# Altium PCB HyperDrive.PcbDoc (part 1 of 2)
Units mm, origin at the board's own origin, x right, y up, seen from the top; angles counter-clockwise.
Board outline 100 x 100 mm, 8 copper layers (SU, GNDU, HSU, PWRU, PWRD, HSD, GNDD, SD), stack 0.757 mm thick; 201 components, 155 nets, 1129 pads, 0 vias.
Unrouted connection lines stored in the file: 714.
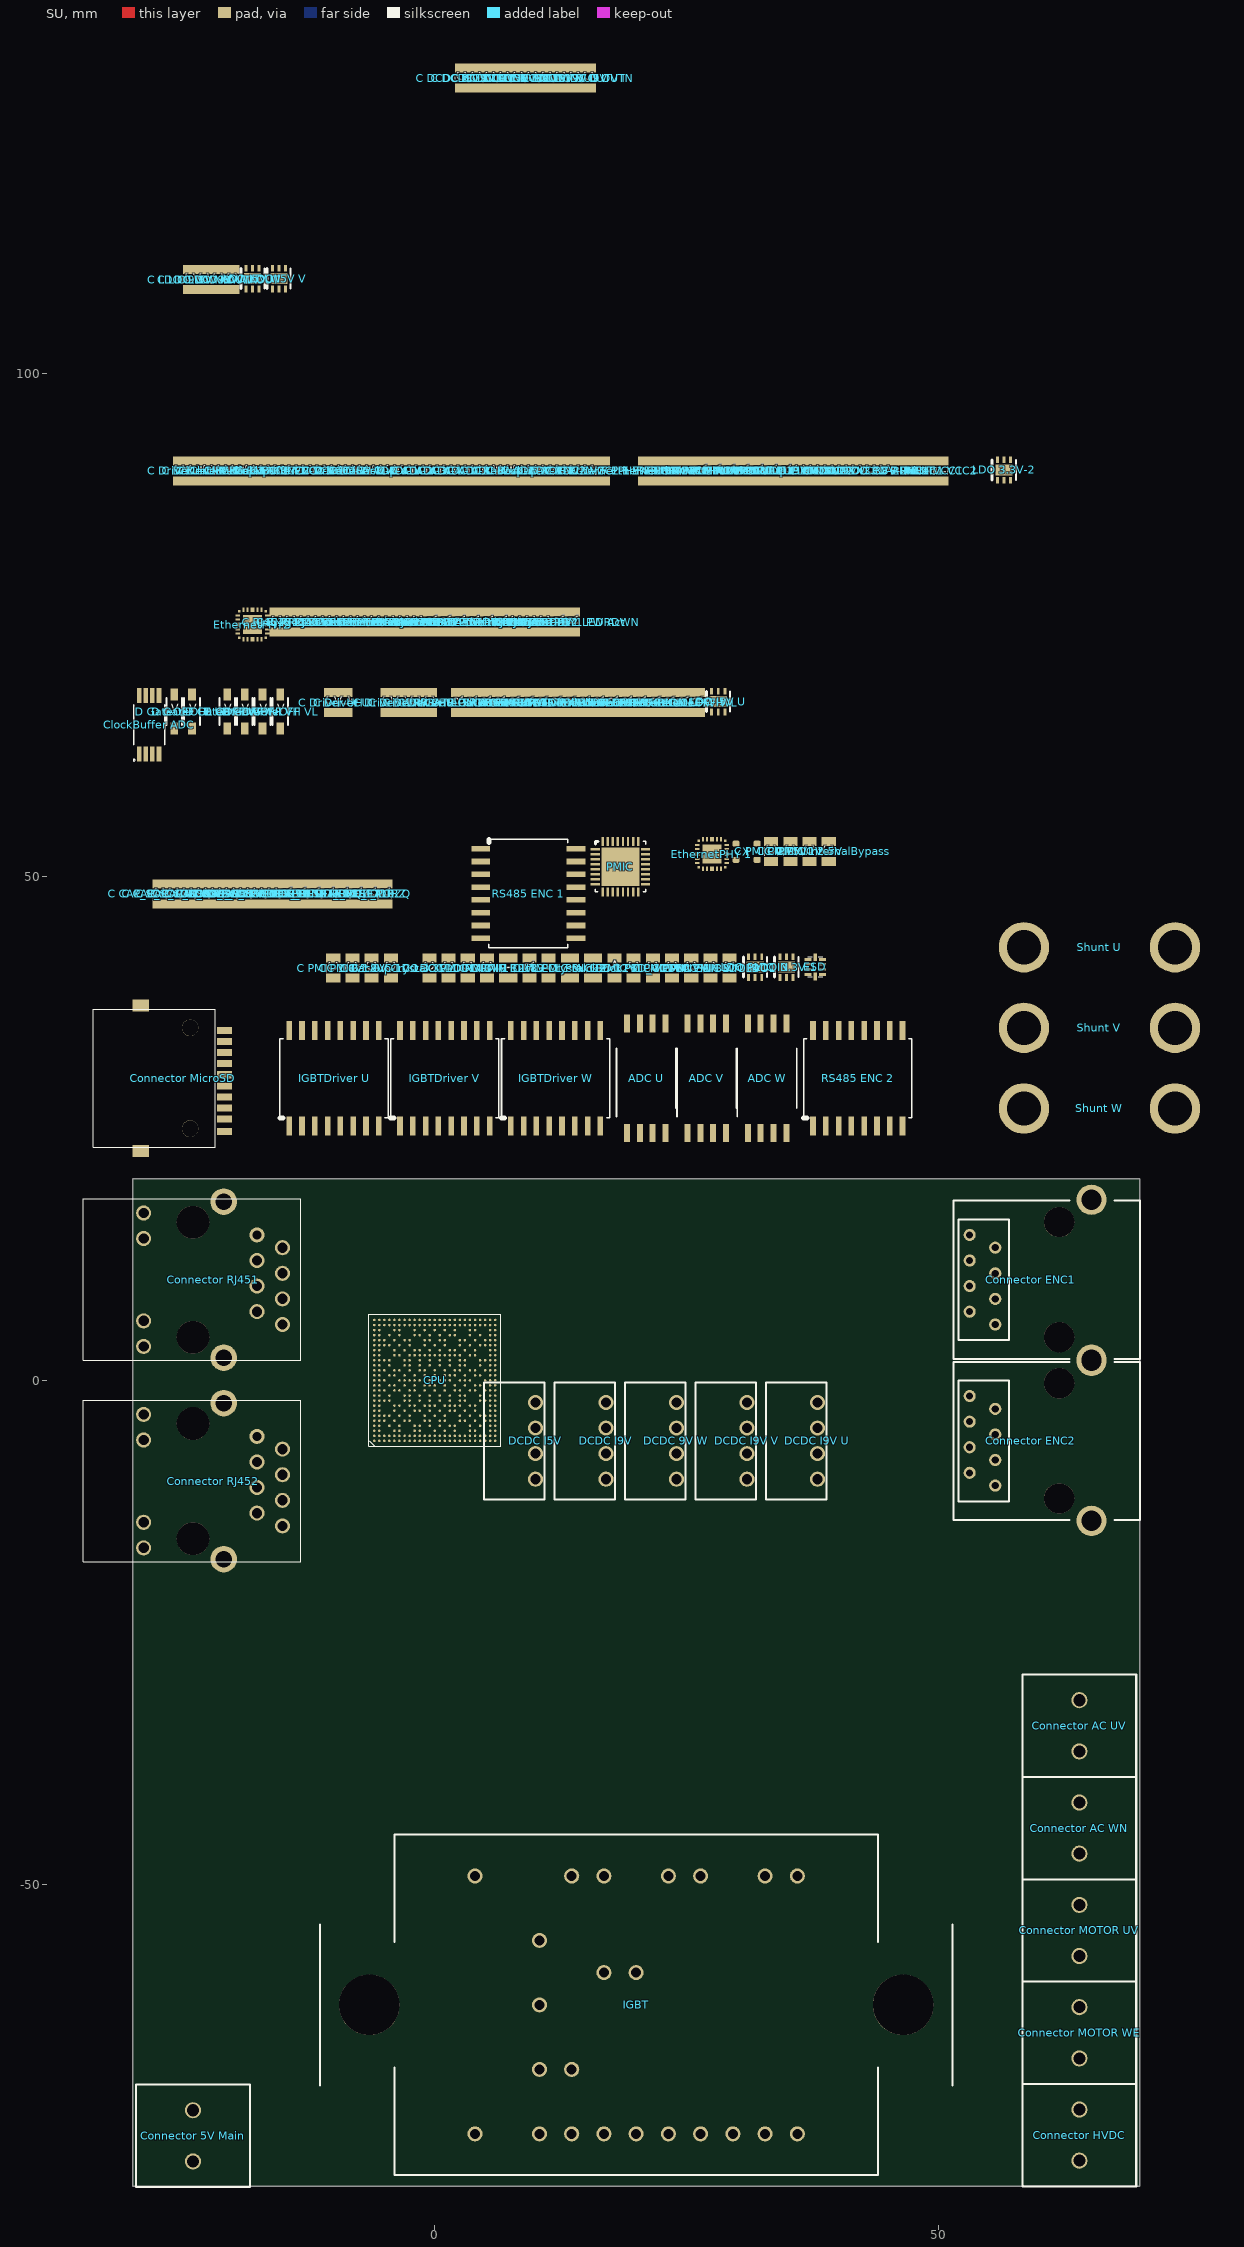
[diagram p0: SU view]
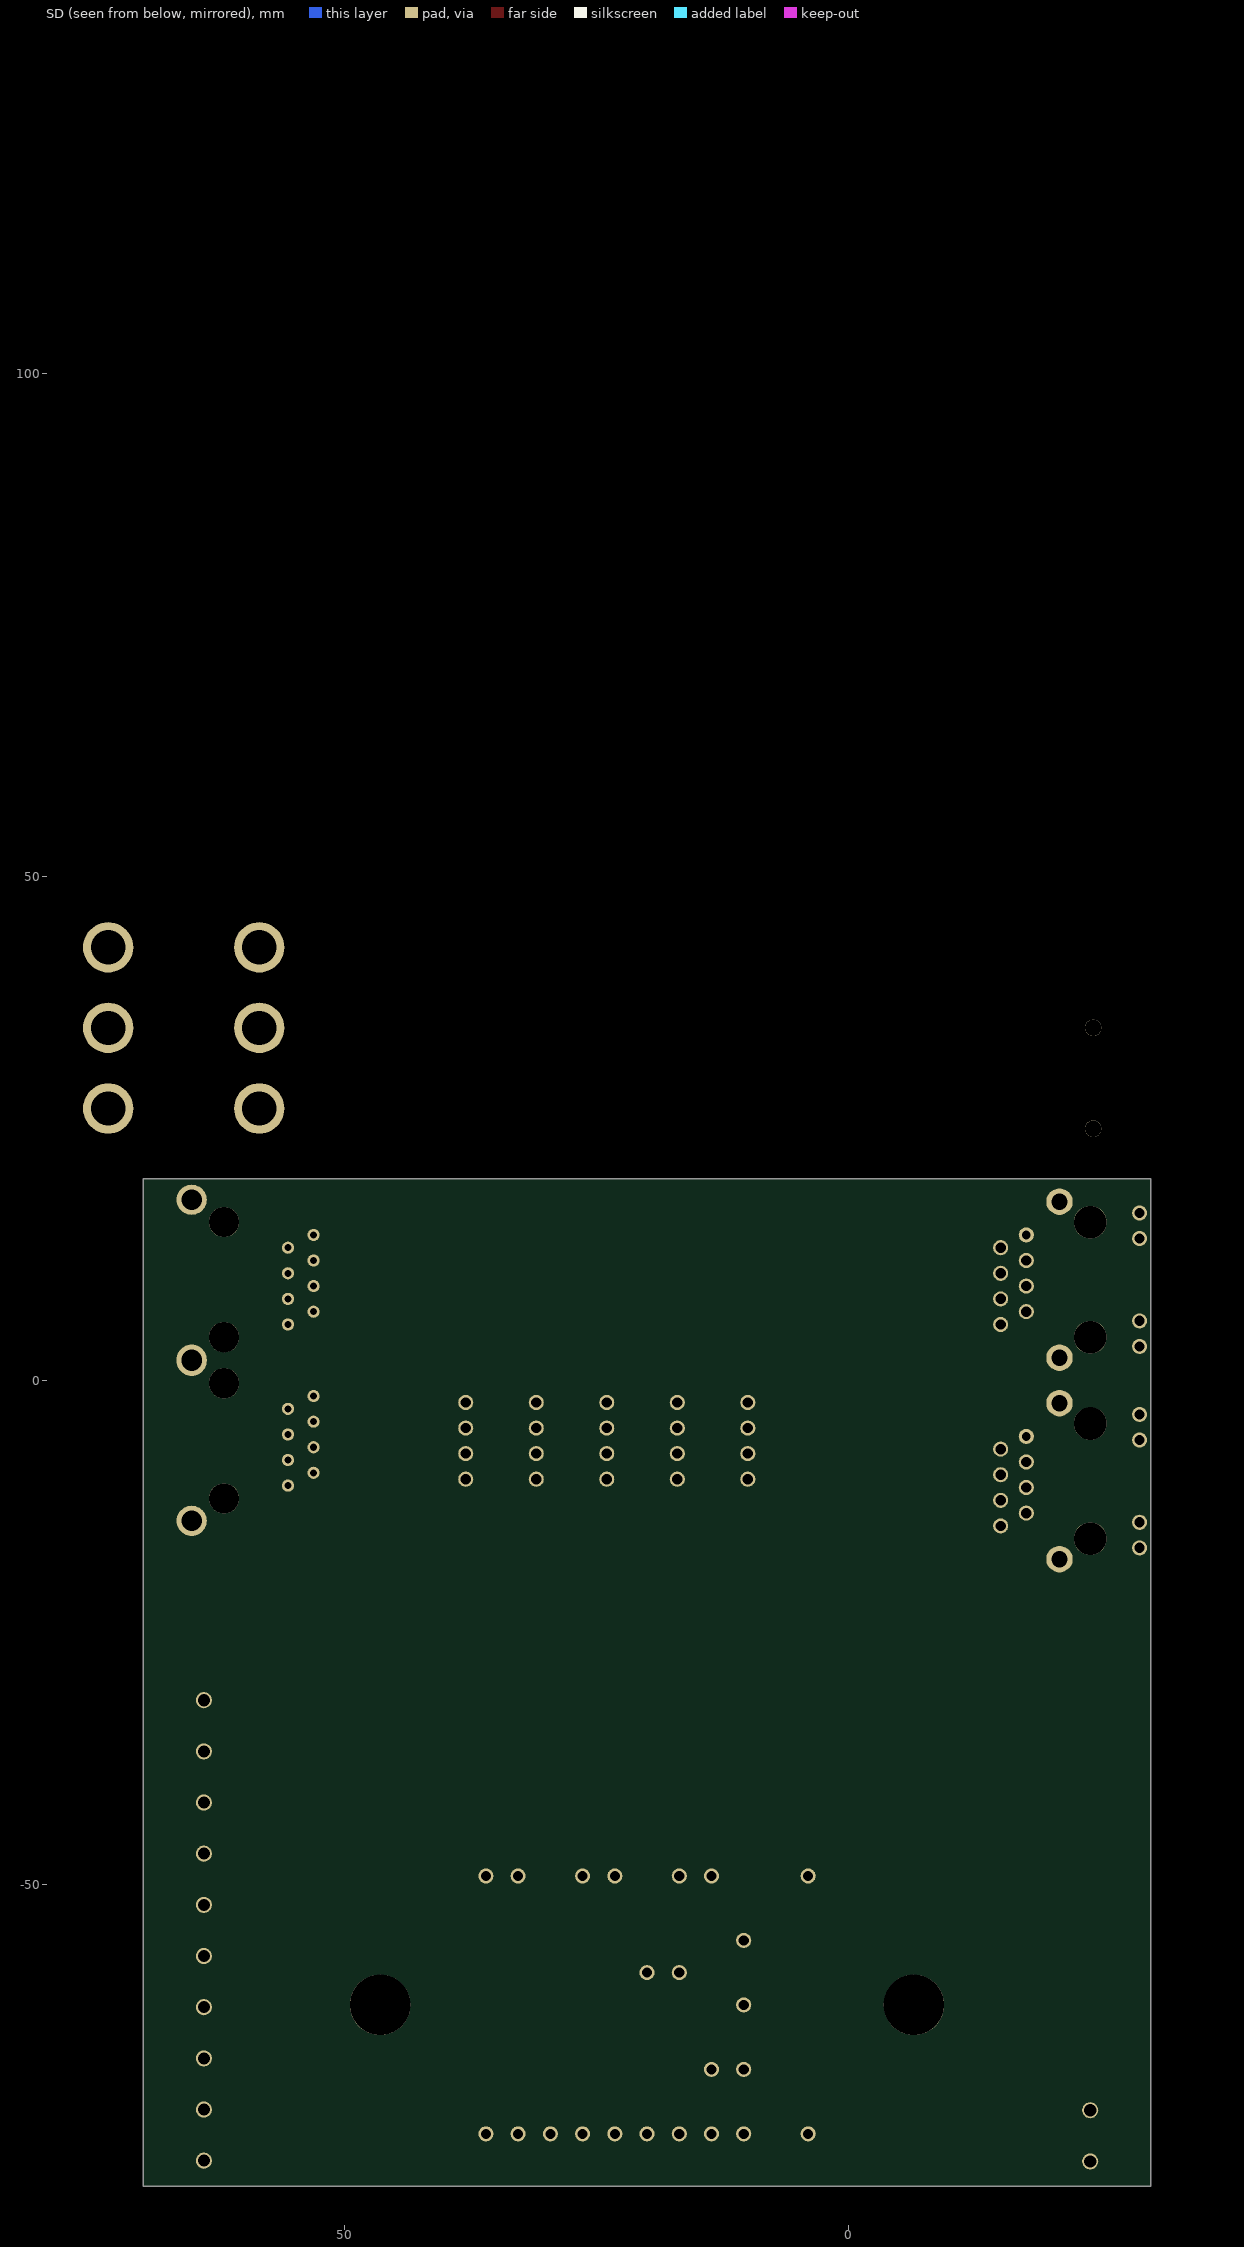
[diagram p1: SD view, seen from below]

## Layer stack, top to bottom
Top Solder: solder mask 0.03, Solder Resist, Dk 3.8
SU: signal copper 0.035
Prepreg 1/2: prepreg 0.0764, Prepreg, Dk 3.91
GNDU: signal copper 0.0152
Core 2/3: core 0.075, Core, Dk 3.99
HSU: signal copper 0.0152
Prepreg 3/4: prepreg 0.1088, Prepreg, Dk 4.16
PWRU: signal copper 0.0152
Core 4/5: core 0.075, Core, Dk 3.99
PWRD: signal copper 0.0152
Prepreg 5/6: prepreg 0.1088, Prepreg, Dk 4.16
HSD: signal copper 0.0152
Core 6/7: core 0.075, Core, Dk 3.99
GNDD: signal copper 0.0152
Prepreg 7/8: prepreg 0.0764, Prepreg, Dk 3.91
SD: signal copper 0.035
Bottom Solder: solder mask 0.03, Solder Resist, Dk 3.8

## Board outline
-30,-80 -30,20 70,20 70,-80

## Design rules (kind name [scope] priority, off if disabled: settings)
BoardOutlineClearance [All] p1 off: gap=0.2 ignorepadtopadclearanceinfootprint=FALSE
Clearance [All] p1: gap=0.099 ignorepadtopadclearanceinfootprint=TRUE except(0.079: Arc-Arc Arc-Track Arc-SMDPad Arc-THPad Arc-Via Arc-Fill Arc-Poly Arc-Region Arc-Text Track-Track Track-SMDPad Track-THPad Track-Via Track-Fill Track-Poly Track-Region Track-Text; 0.199: Arc-Hole Track-Hole SMDPad-Hole THPad-Hole Via-Hole Fill-Hole Poly-Hole Region-Hole Text-Hole)
ComponentClearance [All] p1: gap=0 collisioncheckmode=3 verticalgap=2540 showdistances=FALSE
DiffPairsRouting DiffPairsRouting_DDR_Address_Clock [InDifferentialPairClass('DDR_Address_Clock')] p1: maxlimit=0.5 minlimit=0.09 mostfreqgap=0.11 toplayer_mingap=0.1 toplayer_prefgap=0.1 toplayer_minwidth=0.16 toplayer_maxwidth=0.16 toplayer_prefwidth=0.16 midlayer1_minwidth=0.381 midlayer1_maxwidth=0.381 midlayer1_prefwidth=0.381 midlayer2_mingap=0.104 midlayer2_prefgap=0.104 midlayer2_minwidth=0.096 midlayer2_maxwidth=0.096 midlayer2_prefwidth=0.096 midlayer3_minwidth=0.381 midlayer3_maxwidth=0.381 midlayer3_prefwidth=0.381 midlayer4_minwidth=0.381 midlayer4_maxwidth=0.381 midlayer4_prefwidth=0.381 midlayer5_mingap=0.104 midlayer5_prefgap=0.104 midlayer5_minwidth=0.096 midlayer5_maxwidth=0.096 midlayer5_prefwidth=0.096 midlayer6_minwidth=0.381 midlayer6_maxwidth=0.381 midlayer6_prefwidth=0.381 bottomlayer_mingap=0.1 bottomlayer_prefgap=0.1 bottomlayer_minwidth=0.16 bottomlayer_maxwidth=0.16 bottomlayer_prefwidth=0.16 impedanceprofiledriven=TRUE maxuncoupledlength=10
DiffPairsRouting DiffPairsRouting_DDR_Byte0_Clock [InDifferentialPairClass('DDR_Byte0_Clock')] p2: maxlimit=0.5 minlimit=0.09 mostfreqgap=0.11 toplayer_mingap=0.1 toplayer_prefgap=0.1 toplayer_minwidth=0.16 toplayer_maxwidth=0.16 toplayer_prefwidth=0.16 midlayer1_minwidth=0.381 midlayer1_maxwidth=0.381 midlayer1_prefwidth=0.381 midlayer2_mingap=0.104 midlayer2_prefgap=0.104 midlayer2_minwidth=0.096 midlayer2_maxwidth=0.096 midlayer2_prefwidth=0.096 midlayer3_minwidth=0.381 midlayer3_maxwidth=0.381 midlayer3_prefwidth=0.381 midlayer4_minwidth=0.381 midlayer4_maxwidth=0.381 midlayer4_prefwidth=0.381 midlayer5_mingap=0.104 midlayer5_prefgap=0.104 midlayer5_minwidth=0.096 midlayer5_maxwidth=0.096 midlayer5_prefwidth=0.096 midlayer6_minwidth=0.381 midlayer6_maxwidth=0.381 midlayer6_prefwidth=0.381 bottomlayer_mingap=0.1 bottomlayer_prefgap=0.1 bottomlayer_minwidth=0.16 bottomlayer_maxwidth=0.16 bottomlayer_prefwidth=0.16 impedanceprofiledriven=TRUE maxuncoupledlength=10
DiffPairsRouting DiffPairsRouting_DDR_Byte1_Clock [InDifferentialPairClass('DDR_Byte1_Clock')] p3: maxlimit=0.5 minlimit=0.09 mostfreqgap=0.11 toplayer_mingap=0.1 toplayer_prefgap=0.1 toplayer_minwidth=0.16 toplayer_maxwidth=0.16 toplayer_prefwidth=0.16 midlayer1_minwidth=0.381 midlayer1_maxwidth=0.381 midlayer1_prefwidth=0.381 midlayer2_mingap=0.104 midlayer2_prefgap=0.104 midlayer2_minwidth=0.096 midlayer2_maxwidth=0.096 midlayer2_prefwidth=0.096 midlayer3_minwidth=0.381 midlayer3_maxwidth=0.381 midlayer3_prefwidth=0.381 midlayer4_minwidth=0.381 midlayer4_maxwidth=0.381 midlayer4_prefwidth=0.381 midlayer5_mingap=0.104 midlayer5_prefgap=0.104 midlayer5_minwidth=0.096 midlayer5_maxwidth=0.096 midlayer5_prefwidth=0.096 midlayer6_minwidth=0.381 midlayer6_maxwidth=0.381 midlayer6_prefwidth=0.381 bottomlayer_mingap=0.1 bottomlayer_prefgap=0.1 bottomlayer_minwidth=0.16 bottomlayer_maxwidth=0.16 bottomlayer_prefwidth=0.16 impedanceprofiledriven=TRUE maxuncoupledlength=10
HoleSize [All] p1: absolutevalues=TRUE maxlimit=1 minlimit=0.2 maxpercent=80.000 minpercent=20.000
HoleToHoleClearance [All] p1: gap=0.2 allowstackedmicrovias=TRUE
Length Length_DDR [InNetClass('DDR_HighSpeed')] p1: maxlimit=2540 minlimit=0 usedelayunits=TRUE mindelay=0.000000 maxdelay=500.000000
MatchedLengths MatchedLengths_DDR_Address [InNetClass('DDR_Address')] p1: tolerance=3 checknetsindiffpair=FALSE checkdiffpairvsdiffpair=TRUE checkxsignals=TRUE checkothers=TRUE usedelayunits=TRUE delaytolerance=3.000000
MatchedLengths MatchedLengths_DDR_Address_Clock [InDifferentialPair('DDR_CK0')] p2: tolerance=3 checknetsindiffpair=TRUE checkdiffpairvsdiffpair=FALSE checkxsignals=FALSE checkothers=FALSE usedelayunits=TRUE delaytolerance=0.400000
MatchedLengths MatchedLengths_DDR_Byte0 [InNetClass('DDR_Byte0')] p3: tolerance=3 checknetsindiffpair=FALSE checkdiffpairvsdiffpair=TRUE checkxsignals=TRUE checkothers=TRUE usedelayunits=TRUE delaytolerance=2.000000
MatchedLengths MatchedLengths_DDR_Byte0_CLock [InDifferentialPair('DDR_DQS0')] p4: tolerance=3 checknetsindiffpair=TRUE checkdiffpairvsdiffpair=FALSE checkxsignals=FALSE checkothers=FALSE usedelayunits=TRUE delaytolerance=0.400000
MatchedLengths MatchedLengths_DDR_Byte1 [InNetClass('DDR_Byte1')] p5: tolerance=3 checknetsindiffpair=FALSE checkdiffpairvsdiffpair=TRUE checkxsignals=TRUE checkothers=TRUE usedelayunits=TRUE delaytolerance=2.000000
MatchedLengths MatchedLengths_DDR_Byte1_Clock [InDifferentialPair('DDR_DQS1')] p6: tolerance=3 checknetsindiffpair=TRUE checkdiffpairvsdiffpair=FALSE checkxsignals=FALSE checkothers=FALSE usedelayunits=TRUE delaytolerance=0.400000
MinimumAnnularRing [All] p1: minimumring=0.05
MinimumSolderMaskSliver [Not(InComponent('DP83867'))] p1: minsoldermaskwidth=0.1
NetAntennae [InNet('No Net')] p1: netantennaetolerance=0
ParallelSegment [InNetClass('DDR_HighSpeed')] p1: limit=12.7 gap=0.3
PlaneClearance [All] p1: clearance=0.1
PlaneConnect [All] p1: planeconnectstyle=Relief reliefexpansion=0.1 reliefentries=4 reliefconductorwidth=0.1 reliefairgap=0.1
PolygonConnect PolygonConnect_Power [InNet('GND')OR InNet('3.3Vb')OR InNet('3.3Vbs')] p1 off: thpad.connectstyle=Relief thpad.reliefconductorwidth=0.2 thpad.reliefentries=4 thpad.polygonreliefangle="45 Angle" thpad.airgapwidth=0.2 smdpad.connectstyle=Relief smdpad.reliefconductorwidth=0.2 smdpad.reliefentries=4 smdpad.polygonreliefangle="45 Angle" smdpad.airgapwidth=0.2 smdpad.conductorbypadedge=TRUE smdpad.mindistance=0 smdpad.enablemindistance=FALSE via.connectstyle=Direct via.reliefconductorwidth=0.1 via.reliefentries=4 via.polygonreliefangle="45 Angle" via.airgapwidth=0.1
PolygonConnect [All] p2: thpad.connectstyle=Relief thpad.reliefconductorwidth=0.1 thpad.reliefentries=4 thpad.polygonreliefangle="45 Angle" thpad.airgapwidth=0.1 smdpad.connectstyle=Relief smdpad.reliefconductorwidth=0.1 smdpad.reliefentries=4 smdpad.polygonreliefangle="45 Angle" smdpad.airgapwidth=0.1 smdpad.conductorbypadedge=TRUE smdpad.mindistance=0.381 smdpad.enablemindistance=FALSE via.connectstyle=Direct via.reliefconductorwidth=0.1 via.reliefentries=4 via.polygonreliefangle="45 Angle" via.airgapwidth=0.1
RoutingVias [All] p1: holewidth=0.2 width=0.45 viastyle="Through Hole" minholewidth=0.2 minwidth=0.45 maxholewidth=0.5 maxwidth=1
SilkToSilkClearance [All] p1 off: silktosilkclearance=0.1
SilkToSolderMaskClearance [IsPad] p1 off: minsilkscreentomaskgap=0.05 clearancetoexposedcopper=TRUE
SolderMaskExpansion [All] p1: expansion=0.04 istentingtop=FALSE
SupplyNets "Schematic Supply Nets_16" [InNet('I5V U')] p1: voltage=0.000
SupplyNets "Schematic Supply Nets_15" [InNet('I5V V')] p2: voltage=0.000
SupplyNets "Schematic Supply Nets_14" [InNet('I5V W')] p3: voltage=0.000
SupplyNets "Schematic Supply Nets_10" [InNet('IGND')] p4: voltage=0.000
SupplyNets "Schematic Supply Nets_3" [InNet('I9V')] p5: voltage=0.000
SupplyNets "Schematic Supply Nets_2" [InNet('HVDC')] p6: voltage=0.000
SupplyNets "Schematic Supply Nets_30" [InNet('Motor V')] p7: voltage=0.000
SupplyNets "Schematic Supply Nets_29" [InNet('I9V W')] p8: voltage=0.000
SupplyNets "Schematic Supply Nets_28" [InNet('Motor W')] p9: voltage=0.000
SupplyNets "Schematic Supply Nets_27" [InNet('Motor U')] p10: voltage=0.000
SupplyNets "Schematic Supply Nets_26" [InNet('I9V U')] p11: voltage=0.000
SupplyNets "Schematic Supply Nets_25" [InNet('I9V V')] p12: voltage=0.000
SupplyNets "Schematic Supply Nets" [InNet('GND')] p13: voltage=0.000
SupplyNets "Schematic Supply Nets_24" [InNet('3.3V-2')] p14: voltage=0.000
SupplyNets "Schematic Supply Nets_23" [InNet('I5V')] p15: voltage=0.000
SupplyNets "Schematic Supply Nets_22" [InNet('3.3V-1')] p16: voltage=0.000
SupplyNets "Schematic Supply Nets_19" [InNet('PMIC 3.3V PVIN_LDO')] p17: voltage=0.000
SupplyNets "Schematic Supply Nets_8" [InNet('EARTH')] p18: voltage=0.000
SupplyNets "Schematic Supply Nets_6" [InNet('1.8VA')] p19: voltage=0.000
SupplyNets "Schematic Supply Nets_5" [InNet('3.3V')] p20: voltage=0.000
SupplyNets "Schematic Supply Nets_4" [InNet('5V')] p21: voltage=0.000
SupplyNets "Schematic Supply Nets_1" [InNet('1.1V')] p22: voltage=0.000
SupplyNets "Schematic Supply Nets_13" [InNet('2.5V')] p23: voltage=0.000
SupplyNets "Schematic Supply Nets_12" [InNet('1.8V')] p24: voltage=0.000
SupplyNets "Schematic Supply Nets_11" [InNet('SD VDD')] p25: voltage=0.000
SupplyNets "Schematic Supply Nets_7" [InNet('0.85V')] p26: voltage=0.000
UnRoutedNet [All] p1: checkbadconnections=TRUE
ViasUnderSMD [All] p1: allowed=TRUE
Width [Not(InNetClass('DDR'))] p1: maxlimit=2 minlimit=0.08 preferedwidth=0.2 minimp=50.000000 maximp=50.000000 favimp=50.000000
Width Width_DDR_Byte0 [InNetClass('DDR_Byte0')] p2: maxlimit=0.5 minlimit=0.08 preferedwidth=0.112 toplayer_maxwidth=0.209 toplayer_prefwidth=0.209 midlayer2_maxwidth=0.112 midlayer5_maxwidth=0.112 bottomlayer_maxwidth=0.209 bottomlayer_prefwidth=0.209 impedanceprofiledriven=TRUE minimp=50.000000 maximp=50.000000 favimp=50.000000
Width Width_DDR_Byte1 [InNetClass('DDR_Byte1')] p3: maxlimit=0.5 minlimit=0.08 preferedwidth=0.112 toplayer_maxwidth=0.209 toplayer_prefwidth=0.209 midlayer2_maxwidth=0.112 midlayer5_maxwidth=0.112 bottomlayer_maxwidth=0.209 bottomlayer_prefwidth=0.209 impedanceprofiledriven=TRUE minimp=50.000000 maximp=50.000000 favimp=50.000000
Width Width_DDR_Address [InNetClass('DDR_Address')] p4: maxlimit=0.5 minlimit=0.08 preferedwidth=0.112 toplayer_maxwidth=0.209 toplayer_prefwidth=0.209 midlayer2_maxwidth=0.112 midlayer5_maxwidth=0.112 bottomlayer_maxwidth=0.209 bottomlayer_prefwidth=0.209 impedanceprofiledriven=TRUE minimp=50.000000 maximp=50.000000 favimp=50.000000
Width Width_DDR [InNetClass('DDR')] p5: maxlimit=0.5 minlimit=0.08 preferedwidth=0.112 toplayer_maxwidth=0.209 toplayer_prefwidth=0.209 midlayer2_maxwidth=0.112 midlayer5_maxwidth=0.112 bottomlayer_maxwidth=0.209 bottomlayer_prefwidth=0.209 impedanceprofiledriven=TRUE minimp=50.000000 maximp=50.000000 favimp=50.000000
19 further rules are at their usual default settings.

## Components (designator, comment, footprint, x,y, rotation, side; value= is the part's Value field where it differs from the comment)
"ADC U" "ADC AMC1306M05" AMC1306M05 21,30 r90 top
"ADC V" "ADC AMC1306M05" AMC1306M05 27,30 r90 top
"ADC W" "ADC AMC1306M05" AMC1306M05 33,30 r90 top
"C 1.8V Crystal" "1uF" "Capacitor 2012(0805)" -4.352,40.936 r90 top
"C ADC U-1" "0.1uF" "Capacitor 2012(0805)" 1.3,90.296 r90 top
"C ADC U-2" "1uF" "Capacitor 2012(0805)" 2.7,90.296 r90 top
"C ADC U-3" "0.1uF" "Capacitor 2012(0805)" 4.1,90.296 r90 top
"C ADC U-4" "1uF" "Capacitor 2012(0805)" -0.1,90.296 r90 top
"C ADC V-1" "1uF" "Capacitor 2012(0805)" -4.3,90.296 r90 top
"C ADC V-2" "0.1uF" "Capacitor 2012(0805)" -2.9,90.296 r90 top
"C ADC V-3" "0.1uF" "Capacitor 2012(0805)" -1.5,90.296 r90 top
"C ADC V-4" "1uF" "Capacitor 2012(0805)" 11.1,90.296 r90 top
"C ADC W-1" "1uF" "Capacitor 2012(0805)" 12.5,90.296 r90 top
"C ADC W-2" "0.1uF" "Capacitor 2012(0805)" 13.9,90.296 r90 top
"C ADC W-3" "0.1uF" "Capacitor 2012(0805)" 9.7,90.296 r90 top
"C ADC W-4" "1uF" "Capacitor 2012(0805)" 5.5,90.296 r90 top
"C Backup-1" "22uF" "Capacitor 2012(0805)" -6.26,40.936 r90 top
"C Backup-2" "22uF" "Capacitor 2012(0805)" 6.9,90.296 r90 top
"C Backup-3" "22uF" "Capacitor 2012(0805)" 8.3,90.296 r90 top
"C Backup-4" "22uF" "Capacitor 2012(0805)" -5.7,90.296 r90 top
"C Backup-5" "22uF" "Capacitor 2012(0805)" -19.7,90.296 r90 top
"C Backup-6" "22uF" "Capacitor 2012(0805)" -18.3,90.296 r90 top
"C CAP_SOC MCU" "1uF" "Capacitor 2012(0805)" -20.3,48.296 r90 top
"C CAP_SOC VDDS0" "1uF" "Capacitor 2012(0805)" -21.7,48.296 r90 top
"C CAP_SOC VDDS1" "1uF" "Capacitor 2012(0805)" -17.5,48.296 r90 top
"C CAP_SOC VDDS2" "1uF" "Capacitor 2012(0805)" -18.9,48.296 r90 top
"C CAP_SOC VDDS3" "1uF" "Capacitor 2012(0805)" -25.9,48.296 r90 top
"C CAP_SOC VDDS4" "1uF" "Capacitor 2012(0805)" -27.3,48.296 r90 top
"C CAP_SOC VDDS5" "1uF" "Capacitor 2012(0805)" -23.1,48.296 r90 top
"C CAP_SOC VDDS6" "1uF" "Capacitor 2012(0805)" -24.5,48.296 r90 top
"C CAP_SOC VDDS_CANUART" "1uF" "Capacitor 2012(0805)" -16.1,48.296 r90 top
"C ClockBuffer-1" "0.1uF" "Capacitor 2012(0805)" -16.9,90.296 r90 top
"C ClockBuffer-2" "1uF" "Capacitor 2012(0805)" -21.1,90.296 r90 top
"C DCDC I5V IN" "22uF" "Capacitor 2012(0805)" 6.9,129.296 r90 top
"C DCDC I5V OUT" "22uF" "Capacitor 2012(0805)" 8.3,129.296 r90 top
"C DCDC I9V IN" "22uF" "Capacitor 2012(0805)" 5.5,129.296 r90 top
"C DCDC I9V OUT" "22uF" "Capacitor 2012(0805)" 2.7,129.296 r90 top
"C DCDC I9V U IN" "22uF" "Capacitor 2012(0805)" 4.1,129.296 r90 top
"C DCDC I9V V IN" "22uF" "Capacitor 2012(0805)" 15.3,129.296 r90 top
"C DCDC I9V V OUT" "22uF" "Capacitor 2012(0805)" 12.5,129.296 r90 top
"C DCDC I9V W IN" "22uF" "Capacitor 2012(0805)" 9.7,129.296 r90 top
"C DCDC I9V W OUT" "22uF" "Capacitor 2012(0805)" 11.1,129.296 r90 top
"C DCDCI 9V U OUT" "22uF" "Capacitor 2012(0805)" 13.9,129.296 r90 top
"C Driver UH" "1uF" "Capacitor 2012(0805)" -10.275,67.296 r90 top
"C Driver UL" "1uF" "Capacitor 2012(0805)" -8.875,67.296 r90 top
"C Driver VH" "1uF" "Capacitor 2012(0805)" -1.875,67.296 r90 top
"C Driver VL" "1uF" "Capacitor 2012(0805)" -0.475,67.296 r90 top
"C Driver WH" "1uF" "Capacitor 2012(0805)" -4.675,67.296 r90 top
"C Driver WL" "1uF" "Capacitor 2012(0805)" -3.275,67.296 r90 top
"C DriverU-1" "0.1uF" "Capacitor 2012(0805)" -25.3,90.296 r90 top
"C DriverU-2" "1uF" "Capacitor 2012(0805)" -23.9,90.296 r90 top
"C DriverV-1" "0.1uF" "Capacitor 2012(0805)" -22.5,90.296 r90 top
"C DriverV-2" "1uF" "Capacitor 2012(0805)" -9.9,90.296 r90 top
"C DriverW-1" "0.1uF" "Capacitor 2012(0805)" -8.5,90.296 r90 top
"C DriverW-2" "1uF" "Capacitor 2012(0805)" -7.1,90.296 r90 top
"C ENC1 VCC1" "1uF" "Capacitor 2012(0805)" -11.3,90.296 r90 top
"C ENC1 VCC2-1" "0.1uF" "Capacitor 2012(0805)" -15.5,90.296 r90 top
"C ENC1 VCC2-2" "1uF" "Capacitor 2012(0805)" -14.1,90.296 r90 top
"C ENC2 VCC1" "1uF" "Capacitor 2012(0805)" -12.7,90.296 r90 top
"C ENC2 VCC2-1" "0.1uF" "Capacitor 2012(0805)" 15.3,90.296 r90 top
"C ENC2 VCC2-2" "1uF" "Capacitor 2012(0805)" 41.9,90.296 r90 top
"C EthernetPHY1-1" "10uF" "Capacitor 2012(0805)" -7.293,75.296 r90 top
"C EthernetPHY1-2" "1uF" "Capacitor 2012(0805)" -8.693,75.296 r90 top
"C EthernetPHY1-3" "0.1uF" "Capacitor 2012(0805)" -10.093,75.296 r90 top
"C EthernetPHY2-1" "10uF" "Capacitor 2012(0805)" -3.093,75.296 r90 top
"C EthernetPHY2-2" "1uF" "Capacitor 2012(0805)" -4.493,75.296 r90 top
"C EthernetPHY2-3" "0.1uF" "Capacitor 2012(0805)" -5.893,75.296 r90 top
"C LDO 3.3V-1 IN" "22uF" "Capacitor 2012(0805)" -0.536,40.936 r90 top
"C LDO 3.3V-1 OUT" "22uF" "Capacitor 2012(0805)" 5.188,40.936 r90 top
"C LDO 3.3V-2 IN" "22uF" "Capacitor 2012(0805)" 43.3,90.296 r90 top
"C LDO 3.3V-2 OUT" "22uF" "Capacitor 2012(0805)" 44.7,90.296 r90 top
"C LDO I9V U IN" "22uF" "Capacitor 2012(0805)" 40.5,90.296 r90 top
"C LDO I9V U OUT" "22uF" "Capacitor 2012(0805)" 36.3,90.296 r90 top
"C LDO I9V V IN" "22uF" "Capacitor 2012(0805)" -21.5,109.296 r90 top
"C LDO I9V V OUT" "22uF" "Capacitor 2012(0805)" -22.9,109.296 r90 top
"C LDO I9V W IN" "22uF" "Capacitor 2012(0805)" -24.3,109.296 r90 top
"C LDO I9V W OUT" "22uF" "Capacitor 2012(0805)" -20.1,109.296 r90 top
"C LDO PMIC IN" "22uF" "Capacitor 2012(0805)" 3.28,40.936 r90 top
"C LDO PMIC OUT" "22uF" "Capacitor 2012(0805)" 1.372,40.936 r90 top
"C MMC-1" "1uF" "Capacitor 2012(0805)" 37.7,90.296 r90 top
"C MMC-2" "0.1uF" "Capacitor 2012(0805)" 39.1,90.296 r90 top
"C PMIC 0.75V" "47uF" "Capacitor 2012(0805)" 33.396,52.514 r90 top
"C PMIC 1.1V" "47uF" "Capacitor 2012(0805)" 35.304,52.514 r90 top
"C PMIC 1.8V" "47uF" "Capacitor 2012(0805)" -8.168,40.936 r90 top
"C PMIC 1.8V*" "2.2uF" "Capacitor 2012(0805)" -10.076,40.936 r90 top
"C PMIC 2.5V" "2.2uF" "Capacitor 2012(0805)" 37.212,52.514 r90 top
"C PMIC InternalBypass" "2.2uF" "Capacitor 2012(0805)" 39.12,52.514 r90 top
"C PMIC SD_VDD" "2.2uF" "Capacitor 2012(0805)" 19.744,40.936 r90 top
"C PMIC VIN B1" "4.7uF" "Capacitor 2012(0805)" 23.56,40.936 r90 top
"C PMIC VIN B2" "4.7uF" "Capacitor 2012(0805)" 21.652,40.936 r90 top
"C PMIC VIN B3" "4.7uF" "Capacitor 2012(0805)" 25.468,40.936 r90 top
"C PMIC VIN LDO1" "2.2uF" "Capacitor 2012(0805)" 29.284,40.936 r90 top
"C PMIC VIN LDO34" "4.7uF" "Capacitor 2012(0805)" 27.376,40.936 r90 top
"C RJ451 RD1" "1uF" "Capacitor 2012(0805)" -15.693,75.296 r90 top
"C RJ451 RD2" "0.1uF" "Capacitor 2012(0805)" -11.493,75.296 r90 top
"C RJ451 TD1" "1uF" "Capacitor 2012(0805)" -12.893,75.296 r90 top
"C RJ451 TD2" "0.1uF" "Capacitor 2012(0805)" -14.293,75.296 r90 top
"C RJ452 RD1" "1uF" "Capacitor 2012(0805)" -1.693,75.296 r90 top
"C RJ452 RD2" "0.1uF" "Capacitor 2012(0805)" 9.507,75.296 r90 top
"C RJ452 TD1" "1uF" "Capacitor 2012(0805)" 8.107,75.296 r90 top
"C RJ452 TD2" "0.1uF" "Capacitor 2012(0805)" 10.907,75.296 r90 top
"ClockBuffer ADC" "Clock Buffer LMK1C1104" LMK1C1104PWR -28.35,65.096 r90 top
"Connector 5V Main" "Connector Terminal Screw 5.08mm" "Terminal Screw 5.08mm" -24,-75 r90 top
"Connector AC UV" "Connector Terminal Screw 5.08mm" "Terminal Screw 5.08mm" 64,-34.29 r270 top
"Connector AC WN" "Connector Terminal Screw 5.08mm" "Terminal Screw 5.08mm" 64,-44.45 r270 top
"Connector ENC1" "Connector RJ45" "RJ45-8P8C Generic" 62,10 r90 top
"Connector ENC2" "Connector RJ45" "RJ45-8P8C Generic" 62,-6 r90 top
"Connector HVDC" "Connector Terminal Screw 5.08mm" "Terminal Screw 5.08mm" 64,-74.93 r270 top
"Connector MicroSD" "Connector MUP-M018" "MicroSD MUP-M018" -24.29,30 r90 top
"Connector MOTOR UV" "Connector Terminal Screw 5.08mm" "Terminal Screw 5.08mm" 64,-54.61 r270 top
"Connector MOTOR WE" "Connector Terminal Screw 5.08mm" "Terminal Screw 5.08mm" 64,-64.77 r270 top
"Connector RJ451" "Connector HR911105A" "RJ45 HR911105A" -24,10 r90 top
"Connector RJ452" "Connector HR911105A" "RJ45 HR911105A" -24,-10 r90 top
CPU "CPU AM625SIP" AM625SIP 0,0 r90 top
"D GateOFF UH" "40V 1A" 1N5819HW -24.1,66.406 r90 top
"D GateOFF UL" "40V 1A" 1N5819HW -25.85,66.406 r90 top
"D GateOFF VH" "40V 1A" 1N5819HW -17.1,66.406 r90 top
"D GateOFF VL" "40V 1A" 1N5819HW -15.35,66.406 r90 top
"D GateOFF WH" "40V 1A" 1N5819HW -20.6,66.406 r90 top
"D GateOFF WL" "40V 1A" 1N5819HW -18.85,66.406 r90 top
"DCDC 9V W" "DCDC Isolator" "HiLink DCDC 2W" 24,-6 r90 top
"DCDC I5V" "DCDC Isolator" "HiLink DCDC 2W" 10,-6 r90 top
"DCDC I9V" "DCDC Isolator" "HiLink DCDC 2W" 17,-6 r90 top
"DCDC I9V U" "DCDC Isolator" "HiLink DCDC 2W" 38,-6 r90 top
"DCDC I9V V" "DCDC Isolator" "HiLink DCDC 2W" 31,-6 r90 top
ESD "'" "ESD 6Channel UQFN" 37.788,41.056 r0 top
"EthernetPHY1 PWRDWN" "6.49K 1%" "Resistor 2012(0805)" 13.707,75.296 r90 top
EthernetPHY2 "EthernetPHY DP83825IR" DP83825IRMQR -18.096,75.042 r90 top
"EthernetPHY 1" "EthernetPHY DP83825IR" DP83825IRMQR 27.523,52.26 r90 top
"F 1.8V Crystal" "Ferrite" "Ferrite 2012(0805)" 11.312,40.936 r90 top
"F ADC" "120E" "Ferrite 2012(0805)" 46.1,90.296 r90 top
"F Driver" "120E" "Ferrite 2012(0805)" 47.5,90.296 r90 top
"F ENC1 VCC1" "120E" "Ferrite 2012(0805)" 48.9,90.296 r90 top
"F ENC1 VCC2" "120E" "Ferrite 2012(0805)" 50.3,90.296 r90 top
"F ENC2 VCC1" "120E" "Ferrite 2012(0805)" 22.3,90.296 r90 top
"F ENC2 VCC2" "120E" "Ferrite 2012(0805)" 23.7,90.296 r90 top
"F EthernetPHY1" "120E" "Ferrite 2012(0805)" 25.1,90.296 r90 top
"F EthernetPHY2" "Ferrite" "Ferrite 2012(0805)" 20.9,90.296 r90 top
"F EthernetPHY?" "120E" "Ferrite 2012(0805)" 16.7,90.296 r90 top
IGBT "Infineon FP30R06W1E3" FP30R06W1E3 20,-62 r180 top
"IGBTDriver U" "IGBTDriver UCC21551ADWR" UCC21551ADWR -10,30 r90 top
"IGBTDriver V" "IGBTDriver UCC21551ADWR" UCC21551ADWR 1,30 r90 top
"IGBTDriver W" "IGBTDriver UCC21551ADWR" UCC21551ADWR 12,30 r90 top
"L PMIC Buck1" "0.47uH" "Inductor 2016(0806)" 15.728,40.936 r90 top
"L PMIC Buck2" "0.47uH" "Inductor 2016(0806)" 13.42,40.936 r90 top
"L PMIC Buck3" "0.47uH" "Inductor 2016(0806)" 7.296,40.936 r90 top
"LDO 3.3V-1" "LDO TLV767" TLV767xxDRVR 34.925,41.03 r90 top
"LDO 3.3V-2" "LDO TLV767" TLV767xxDRVR 56.525,90.39 r90 top
"LDO I5V U" "LDO TLV767" TLV767xxDRVR 28.15,67.39 r90 top
"LDO I5V V" "LDO TLV767" TLV767xxDRVR -15.475,109.39 r90 top
"LDO I5V W" "LDO TLV767" TLV767xxDRVR -18.075,109.39 r90 top
"LDO PMIC IN" "LDO TLV767" TLV767xxDRVR 31.817,41.03 r90 top
"LED 12V" "Ferrite" "LED 2012(0805)" 17.836,40.936 r90 top
PMIC "PTPS6521901RHBR" "PMIC TPS6521901RHBR" 18.44,51.008 r0 top
"R 12V LED" "Resistor" "Resistor 2012(0805)" 9.404,40.936 r90 top
"R DDR0_CAL0" "240E 1%" "Resistor 2012(0805)" -7.7,48.296 r90 top
"R DDR_RESET" "240E 1%" "Resistor 2012(0805)" -9.1,48.296 r90 top
"R DDRZQ" "240E 1%" "Resistor 2012(0805)" -4.9,48.296 r90 top
"R EthernetPHY1 LED Act" "6.49K 1%" "Resistor 2012(0805)" 12.307,75.296 r90 top
"R EthernetPHY1 LED Link" "6.49K 1%" "Resistor 2012(0805)" 6.707,75.296 r90 top
"R EthernetPHY2 LED Act" "6.49K 1%" "Resistor 2012(0805)" 1.107,75.296 r90 top
"R EthernetPHY2 LED Link" "6.49K 1%" "Resistor 2012(0805)" -0.293,75.296 r90 top
"R EthernetPHY2 PWRDN" "6.49K 1%" "Resistor 2012(0805)" 2.507,75.296 r90 top
"R GATE PullDown UH" "" "Resistor 2012(0805)" 3.725,67.296 r90 top
"R GATE PullDown UL" "" "Resistor 2012(0805)" 13.525,67.296 r90 top
"R GATE PullDown VH" "" "Resistor 2012(0805)" 14.925,67.296 r90 top
"R GATE PullDown VL" "" "Resistor 2012(0805)" 12.125,67.296 r90 top
"R GATE PullDown WH" "" "Resistor 2012(0805)" 9.325,67.296 r90 top
"R GATE PullDown WL" "" "Resistor 2012(0805)" 10.725,67.296 r90 top
"R GateOFF UH" "" "Resistor 2012(0805)" 19.125,67.296 r90 top
"R GateOFF UL" "" "Resistor 2012(0805)" 20.525,67.296 r90 top
"R GateOFF VH" "" "Resistor 2012(0805)" 16.325,67.296 r90 top
"R GateOFF VL" "" "Resistor 2012(0805)" 17.725,67.296 r90 top
"R GateOFF WH" "" "Resistor 2012(0805)" 24.725,67.296 r90 top
"R GateOFF WL" "" "Resistor 2012(0805)" 26.125,67.296 r90 top
"R GateON UH" "" "Resistor 2012(0805)" 23.325,67.296 r90 top
"R GateON UL" "" "Resistor 2012(0805)" 21.925,67.296 r90 top
"R GateON VH" "" "Resistor 2012(0805)" 6.525,67.296 r90 top
"R GateON VL" "" "Resistor 2012(0805)" 7.925,67.296 r90 top
"R GateON WH" "" "Resistor 2012(0805)" 5.125,67.296 r90 top
"R GateON WL" "" "Resistor 2012(0805)" 2.325,67.296 r90 top
"R MCU_PORZ" "240E 1%" "Resistor 2012(0805)" -6.3,48.296 r90 top
"R MCU_RESETZ" "240E 1%" "Resistor 2012(0805)" -13.3,48.296 r90 top
"R MMC PULLUP CLK" "10K" "Resistor 2012(0805)" 32.1,90.296 r90 top
"R MMC PULLUP CMD" "10K" "Resistor 2012(0805)" 33.5,90.296 r90 top
"R MMC PULLUP D0" "10K" "Resistor 2012(0805)" 34.9,90.296 r90 top
"R MMC PULLUP D1" "10K" "Resistor 2012(0805)" 30.7,90.296 r90 top
"R MMC PULLUP D2" "10K" "Resistor 2012(0805)" 26.5,90.296 r90 top
"R MMC PULLUP D3" "10K" "Resistor 2012(0805)" 27.9,90.296 r90 top
"R PMIC Enable Pullup" "10K" "Resistor 2012(0805)" 29.3,90.296 r90 top
"R PORZ_OUT" "240E 1%" "Resistor 2012(0805)" -14.7,48.296 r90 top
"R RBIAS EthernetPHY1" "6.49K 1%" "Resistor 2012(0805)" 5.307,75.296 r90 top
"R RBIAS EthernetPHY2" "6.49K 1%" "Resistor 2012(0805)" 3.907,75.296 r90 top
"R RESET_REQZ" "240E 1%" "Resistor 2012(0805)" -10.5,48.296 r90 top
"R RESETSTATZ" "240E 1%" "Resistor 2012(0805)" -11.9,48.296 r90 top
"RS485 ENC 1" "RS485 ISO3088" ISO3088 9.305,48.342 r0 top
"RS485 ENC 2" "RS485 ISO3088" ISO3088 42,30 r90 top
"Shunt U" "Shunt Resistor" "CG FL-U 40A" 66,43 r0 top
"Shunt V" "Shunt Resistor" "CG FL-U 40A" 66,35 r0 top
"Shunt W" "Shunt Resistor" "CG FL-U 40A" 66,27 r0 top
X "Crystal 4pin" CDC6CE025000ADLER 30.961,52.487 r90 top

## Footprints (in the part's own frame and the unit in brackets; to place one, negate y for a bottom-side part, rotate by r counter-clockwise, add the part's x,y. Pads: shape width x height; smd on the part's side, far side on the other; paste and mask are expansions set on the pad)
1N5819HW [mm]
  rect 1.2x0.75 smd: 1(-1.7,0) 2(1.7,0)
  silkscreen extent -1.35,-0.77 1.35,0.77, body extent -1.85,-0.77 1.85,0.77, height 1.45
AM625SIP [mm]
  round 0.25 smd paste+0 mask+0: A1(-6,6) A2(-5.5,6) A3(-5,6) A4(-4.5,6) A5(-4,6) A6(-3.5,6) A7(-3,6) A8(-2.5,6) A9(-2,6) A10(-1.5,6) A11(-1,6) A12(-0.5,6) A13(0,6) A14(0.5,6) A15(1,6) A16(1.5,6) A17(2,6) A18(2.5,6) A19(3,6) A20(3.5,6) A21(4,6) A22(4.5,6) A23(5,6) A24(5.5,6) A25(6,6) AA1(-6,-4) AA2(-5.5,-4) AA3(-5,-4) AA5(-4,-4) AA7(-3,-4) AA8(-2.5,-4) AA11(-1,-4) AA12(-0.5,-4) AA14(0.5,-4) AA15(1,-4) AA18(2.5,-4) AA19(3,-4) AA21(4,-4) AA23(5,-4) AA24(5.5,-4) AA25(6,-4) AB1(-6,-4.5) AB2(-5.5,-4.5) AB4(-4.5,-4.5) AB6(-3.5,-4.5) AB9(-2,-4.5) AB10(-1.5,-4.5) AB12(-0.5,-4.5) AB14(0.5,-4.5) AB16(1.5,-4.5) AB17(2,-4.5) AB20(3.5,-4.5) AB22(4.5,-4.5) AB24(5.5,-4.5) AB25(6,-4.5) AC1(-6,-5) AC2(-5.5,-5) AC5(-4,-5) AC6(-3.5,-5) AC9(-2,-5) AC11(-1,-5) AC13(0,-5) AC15(1,-5) AC17(2,-5) AC20(3.5,-5) AC21(4,-5) AC24(5.5,-5) AC25(6,-5) AD1(-6,-5.5) AD2(-5.5,-5.5) AD3(-5,-5.5) AD4(-4.5,-5.5) AD5(-4,-5.5) AD6(-3.5,-5.5) AD7(-3,-5.5) AD8(-2.5,-5.5) AD9(-2,-5.5) AD10(-1.5,-5.5) AD11(-1,-5.5) AD12(-0.5,-5.5) AD13(0,-5.5) AD14(0.5,-5.5) AD15(1,-5.5) AD16(1.5,-5.5) AD17(2,-5.5) AD18(2.5,-5.5) AD19(3,-5.5) AD20(3.5,-5.5) AD21(4,-5.5) AD22(4.5,-5.5) AD23(5,-5.5) AD24(5.5,-5.5) AD25(6,-5.5) AE1(-6,-6) AE2(-5.5,-6) AE3(-5,-6) AE4(-4.5,-6) AE5(-4,-6) AE6(-3.5,-6) AE7(-3,-6) AE8(-2.5,-6) AE9(-2,-6) AE10(-1.5,-6) AE11(-1,-6) AE12(-0.5,-6) AE13(0,-6) AE14(0.5,-6) AE15(1,-6) AE16(1.5,-6) AE17(2,-6) AE18(2.5,-6) AE19(3,-6) AE20(3.5,-6) AE21(4,-6) AE22(4.5,-6) AE23(5,-6) AE24(5.5,-6) AE25(6,-6) B1(-6,5.5) B2(-5.5,5.5) B3(-5,5.5) B4(-4.5,5.5) B5(-4,5.5) B6(-3.5,5.5) B7(-3,5.5) B8(-2.5,5.5) B9(-2,5.5) B10(-1.5,5.5) B11(-1,5.5) B12(-0.5,5.5) B13(0,5.5) B14(0.5,5.5) B15(1,5.5) B16(1.5,5.5) B17(2,5.5) B18(2.5,5.5) B19(3,5.5) B20(3.5,5.5) B21(4,5.5) B22(4.5,5.5) B23(5,5.5) B24(5.5,5.5) B25(6,5.5) C1(-6,5) C2(-5.5,5) C5(-4,5) C6(-3.5,5) C9(-2,5) C11(-1,5) C13(0,5) C15(1,5) C17(2,5) C20(3.5,5) C21(4,5) C24(5.5,5) C25(6,5) D1(-6,4.5) D2(-5.5,4.5) D4(-4.5,4.5) D6(-3.5,4.5) D9(-2,4.5) D10(-1.5,4.5) D12(-0.5,4.5) D14(0.5,4.5) D16(1.5,4.5) D17(2,4.5) D20(3.5,4.5) D22(4.5,4.5) D24(5.5,4.5) D25(6,4.5) E1(-6,4) E2(-5.5,4) E3(-5,4) E5(-4,4) E7(-3,4) E8(-2.5,4) E11(-1,4) E12(-0.5,4) E14(0.5,4) E15(1,4) E18(2.5,4) E19(3,4) E21(4,4) E23(5,4) E24(5.5,4) E25(6,4) F1(-6,3.5) F2(-5.5,3.5) F3(-5,3.5) F4(-4.5,3.5) F6(-3.5,3.5) F8(-2.5,3.5) F11(-1,3.5) F13(0,3.5) F15(1,3.5) F18(2.5,3.5) F20(3.5,3.5) F22(4.5,3.5) F23(5,3.5) F24(5.5,3.5) F25(6,3.5) G1(-6,3) G2(-5.5,3) G5(-4,3) G7(-3,3) G9(-2,3) G10(-1.5,3) G12(-0.5,3) G13(0,3) G14(0.5,3) G16(1.5,3) G17(2,3) G19(3,3) G21(4,3) G24(5.5,3) G25(6,3) H1(-6,2.5) H2(-5.5,2.5) H5(-4,2.5) H6(-3.5,2.5) H8(-2.5,2.5) H9(-2,2.5) H10(-1.5,2.5) H11(-1,2.5) H13(0,2.5) H15(1,2.5) H16(1.5,2.5) H17(2,2.5) H18(2.5,2.5) H20(3.5,2.5) H21(4,2.5) H24(5.5,2.5) H25(6,2.5) J1(-6,2) J2(-5.5,2) J3(-5,2) J4(-4.5,2) J7(-3,2) J8(-2.5,2) J11(-1,2) J12(-0.5,2) J13(0,2) J14(0.5,2) J18(2.5,2) J19(3,2) J22(4.5,2) J23(5,2) J24(5.5,2) J25(6,2) K1(-6,1.5) K2(-5.5,1.5) K3(-5,1.5) K4(-4.5,1.5) K7(-3,1.5) K9(-2,1.5) K10(-1.5,1.5) K13(0,1.5) K15(1,1.5) K16(1.5,1.5) K17(2,1.5) K18(2.5,1.5) K19(3,1.5) K22(4.5,1.5) K24(5.5,1.5) K25(6,1.5) L1(-6,1) L2(-5.5,1) L5(-4,1) L6(-3.5,1) L8(-2.5,1) L11(-1,1) L12(-0.5,1) L14(0.5,1) L15(1,1) L18(2.5,1) L20(3.5,1) L21(4,1) L23(5,1) L24(5.5,1) L25(6,1) M1(-6,0.5) M2(-5.5,0.5) M4(-4.5,0.5) M5(-4,0.5) M7(-3,0.5) M8(-2.5,0.5) M9(-2,0.5) M10(-1.5,0.5) M12(-0.5,0.5) M13(0,0.5) M16(1.5,0.5) M17(2,0.5) M18(2.5,0.5) M19(3,0.5) M21(4,0.5) M22(4.5,0.5) M24(5.5,0.5) M25(6,0.5) N1(-6,0) N2(-5.5,0) N3(-5,0) N6(-3.5,0) N8(-2.5,0) N11(-1,0) N12(-0.5,0) N13(0,0) N14(0.5,0) N15(1,0) N18(2.5,0) N20(3.5,0) N23(5,0) N24(5.5,0) N25(6,0) P1(-6,-0.5) P2(-5.5,-0.5) P4(-4.5,-0.5) P5(-4,-0.5) P7(-3,-0.5) P9(-2,-0.5) P10(-1.5,-0.5) P13(0,-0.5) P16(1.5,-0.5) P17(2,-0.5) P18(2.5,-0.5) P19(3,-0.5) P21(4,-0.5) P22(4.5,-0.5) P24(5.5,-0.5) P25(6,-0.5) R1(-6,-1) R2(-5.5,-1) R3(-5,-1) R5(-4,-1) R6(-3.5,-1) R8(-2.5,-1) R11(-1,-1) R12(-0.5,-1) R13(0,-1) R14(0.5,-1) R15(1,-1) R18(2.5,-1) R20(3.5,-1) R21(4,-1) R23(5,-1) R24(5.5,-1) R25(6,-1) T1(-6,-1.5) T2(-5.5,-1.5) T4(-4.5,-1.5) T7(-3,-1.5) T8(-2.5,-1.5) T9(-2,-1.5) T10(-1.5,-1.5) T13(0,-1.5) T14(0.5,-1.5) T16(1.5,-1.5) T17(2,-1.5) T18(2.5,-1.5) T19(3,-1.5) T22(4.5,-1.5) T24(5.5,-1.5) T25(6,-1.5) U1(-6,-2) U2(-5.5,-2) U3(-5,-2) U4(-4.5,-2) U7(-3,-2) U8(-2.5,-2) U11(-1,-2) U12(-0.5,-2) U14(0.5,-2) U15(1,-2) U18(2.5,-2) U19(3,-2) U22(4.5,-2) U23(5,-2) U24(5.5,-2) U25(6,-2) V1(-6,-2.5) V2(-5.5,-2.5) V5(-4,-2.5) V6(-3.5,-2.5) V8(-2.5,-2.5) V9(-2,-2.5) V10(-1.5,-2.5) V11(-1,-2.5) V13(0,-2.5) V15(1,-2.5) V16(1.5,-2.5) V17(2,-2.5) V18(2.5,-2.5) V20(3.5,-2.5) V21(4,-2.5) V24(5.5,-2.5) V25(6,-2.5) W1(-6,-3) W2(-5.5,-3) W5(-4,-3) W7(-3,-3) W9(-2,-3) W10(-1.5,-3) W12(-0.5,-3) W13(0,-3) W14(0.5,-3) W16(1.5,-3) W17(2,-3) W19(3,-3) W21(4,-3) W24(5.5,-3) W25(6,-3) Y1(-6,-3.5) Y2(-5.5,-3.5) Y3(-5,-3.5) Y4(-4.5,-3.5) Y6(-3.5,-3.5) Y8(-2.5,-3.5) Y11(-1,-3.5) Y13(0,-3.5) Y15(1,-3.5) Y18(2.5,-3.5) Y20(3.5,-3.5) Y22(4.5,-3.5) Y23(5,-3.5) Y24(5.5,-3.5) Y25(6,-3.5)
  silkscreen extent -6.55,-6.55 6.55,6.55, body extent -6.5,-6.5 6.5,6.5, height 1.15
AMC1306M05 [mm]
  rect 1.8x0.6 smd paste+0 mask+0: 1(-5.45,1.905) 2(-5.45,0.635) 3(-5.45,-0.635) 4(-5.45,-1.905) 5(5.45,-1.905) 6(5.45,-0.635) 7(5.45,0.635) 8(5.45,1.905)
  silkscreen extent -3.8,-2.95 2.98,2.95, body extent -5.77,-2.93 5.77,2.93, height 2.72
"Capacitor 2012(0805)" [mm]
  rect 0.9x1.4 smd mask+0: 1(-1,0) 2(1,0)
  silkscreen extent -0.4,-0.65 0.4,0.65, body extent -1,-0.63 1,0.63, height 0.82
CDC6CE025000ADLER [mm] "Crystal Clock Generator 25Mhz"
  rrect50% 0.6x0.7 smd: 1(-0.8,1.05) 2(-0.8,-1.05) 3(0.8,-1.05) 4(0.8,1.05)
  body extent -1.25,-1.6 1.25,1.6, height 0.9
"CG FL-U 40A" [mm]
  round 5 hole 3.4: 1(-7.5,0) 2(7.5,0)
  body extent -8.2,-3 8.2,3, height 11.5
DP83825IRMQR [mil]
  rect 18x8 smd paste+0 mask+0: 1(-58.07,35.43) 2(-58.07,19.68) 4(-58.07,-19.68) 5(-58.07,-35.43) 13(58.07,-35.43) 14(58.07,-19.68) 16(58.07,19.68) 17(58.07,35.43)
  rect 18x16 smd paste+0 mask+0: 3(-58.07,0) 15(58.07,0)
  rect 10x10 smd paste+0 mask+0: 6(-52.17,-52.17) 12(52.17,-52.17) 18(52.17,52.17) 24(-52.17,52.17)
  rect 8x18 smd paste+0 mask+0: 7(-35.43,-58.07) 8(-19.69,-58.07) 10(19.68,-58.07) 11(35.43,-58.07) 19(35.43,58.07) 20(19.68,58.07) 22(-19.69,58.07) 23(-35.43,58.07)
  rect 16x18 smd paste+0 mask+0: 9(0,-58.07) 21(0,58.07)
  rect 74.8x74.8 smd paste+0 mask+0: 25(0,0)
  body extent -59,-59 59,59, height 31
"ESD 6Channel UQFN" [mm]
  rect 0.705x0.3 smd paste-0.352 mask-0.356: 1(-0.727,0.75) 4(0.727,-0.75) ""(-0.727,-0.75) ""(0.727,0.75)
  rect 0.705x0.25 smd paste-0.352 mask-0.356: 2(-0.727,0.25) 3(-0.727,-0.25) 5(0.727,-0.25) 6(0.727,0.25)
  rect 0.35x0.755 smd paste-0.377 mask-0.381: GND(0,-0.952) VCC(0,0.952)
  silkscreen extent -0.75,-1 0.75,1, body extent -0.75,-1 0.75,1, height 0.6
"Ferrite 2012(0805)" [mm]
  rect 0.9x1.4 smd mask+0: 1(-1,0) 2(1,0)
  silkscreen extent -0.4,-0.65 0.4,0.65, body extent -1,-0.63 1,0.63, height 0.85
FP30R06W1E3 [mm]
  round 1.5 hole 1: B(16,12.8) EU(-16,12.8) EV(-9.6,12.8) EW(-3.2,12.8) G1(-12.8,-12.8) G2(-12.8,12.8) G3(-3.2,-12.8) G4(-6.4,12.8) G5(6.4,-12.8) G6(0,12.8) GB(6.4,12.8) L1(16,-12.8) L2(9.6,-6.4) L3(9.6,0) N(3.2,12.8) NB(9.6,12.8) P(9.6,6.4) P1(6.4,6.4) T1(3.2,-3.2) T2(0,-3.2) U(-16,-12.8) V(-6.4,-12.8) W(3.2,-12.8)
  round 6 hole 6 unplated: ""(-26.5,0) ""(26.5,0)
  silkscreen extent -31.4,-16.9 31.4,16.9, body extent -31.4,-16.9 31.4,16.9, height 12
"HiLink DCDC 2W" [mm]
  round 1.5 hole 1: VIN+(-1.27,0) VIN-(-3.81,0) VOUT+(3.81,0) VOUT-(1.27,0)
  silkscreen extent -5.8,-0.9 5.8,5.1, body extent -5.8,-0.9 5.8,5.1, height 10.16
"Inductor 2016(0806)" [mm]
  rect 0.9x1.8 smd mask+0: 1(-1,0) 2(1,0)
  silkscreen extent -0.4,-0.65 0.4,0.65, body extent -1,-0.8 1,0.8, height 1.1
ISO3088 [mm]
  rect 1.874x0.558 smd paste+0 mask+0: 1(-4.734,4.445) 2(-4.734,3.175) 3(-4.734,1.905) 4(-4.734,0.635) 5(-4.734,-0.635) 6(-4.734,-1.905) 7(-4.734,-3.175) 8(-4.734,-4.445) 9(4.734,-4.445) 10(4.734,-3.175) 11(4.734,-1.905) 12(4.734,-0.635) 13(4.734,0.635) 14(4.734,1.905) 15(4.734,3.175) 16(4.734,4.445)
  silkscreen extent -3.92,-5.37 3.92,5.37, body extent -5.32,-5.25 5.32,5.25, height 2.64
"LED 2012(0805)" [mm]
  rect 0.9x1.4 smd mask+0: 1(-1,0) 2(1,0)
  silkscreen extent -0.4,-0.65 0.4,0.65, body extent -1,-0.63 1,0.63, height 1.5
LMK1C1104PWR [mm]
  rect 1.5x0.45 smd paste+0 mask+0: 1(-2.9,0.975) 2(-2.9,0.325) 3(-2.9,-0.325) 4(-2.9,-0.975) 5(2.9,-0.975) 6(2.9,-0.325) 7(2.9,0.325) 8(2.9,0.975)
  silkscreen extent -3.6,-1.55 2,1.6, body extent -3.21,-1.5 3.21,1.5, height 1.11
"MicroSD MUP-M018" [mm]
  rect 0.7x1.5 smd: 1(-2.95,-3.4) 2(-1.85,-3.4) 3(-0.75,-3.4) 4(0.35,-3.4) 5(1.45,-3.4) 6(2.55,-3.4) 7(3.65,-3.4) 8(4.75,-3.4) 9(-4.05,-3.4) 10(-5.3,-3.4)
  rect 1.2x1.6 smd: SH(-7.225,4.9) SH(7.225,4.9)
  round 1.65 hole 1.65 unplated: ""(-5,0) ""(5,0)
  silkscreen extent -6.85,-2.5 6.85,9.6, body extent -6.85,-2.5 6.85,9.6, height 0.8
"PMIC TPS6521901RHBR" [mm]
  rect 0.906x0.242 smd paste+0 mask+0: 1(-2.503,1.75) 2(-2.503,1.25) 3(-2.503,0.75) 4(-2.503,0.25) 5(-2.503,-0.25) 6(-2.503,-0.75) 7(-2.503,-1.25) 8(-2.503,-1.75) 17(2.503,-1.75) 18(2.503,-1.25) 19(2.503,-0.75) 20(2.503,-0.25) 21(2.503,0.25) 22(2.503,0.75) 23(2.503,1.25) 24(2.503,1.75)
  rect 0.242x0.906 smd paste+0 mask+0: 9(-1.75,-2.503) 10(-1.25,-2.503) 11(-0.75,-2.503) 12(-0.25,-2.503) 13(0.25,-2.503) 14(0.75,-2.503) 15(1.25,-2.503) 16(1.75,-2.503) 25(1.75,2.503) 26(1.25,2.503) 27(0.75,2.503) 28(0.25,2.503) 29(-0.25,2.503) 30(-0.75,2.503) 31(-1.25,2.503) 32(-1.75,2.503)
  rect 3.8x3.8 smd paste-1.887 mask+0: 33(0,0)
  silkscreen extent -2.5,-2.5 2.5,2.5, body extent -2.5,-2.5 2.5,2.5, height 1
"Resistor 2012(0805)" [mm]
  rect 0.9x1.4 smd mask+0: 1(-1,0) 2(1,0)
  silkscreen extent -0.4,-0.65 0.4,0.65, body extent -1,-0.63 1,0.63, height 0.5
"RJ45 HR911105A" [mm]
  round 1.5 hole 0.89: 1(4.445,-6.35)
  round 1.5 hole 1.02: 2(3.175,-8.89) 3(1.905,-6.35) 4(0.635,-8.89) 5(-0.635,-6.35) 6(-1.905,-8.89) 7(-3.175,-6.35) 8(-4.445,-8.89) 9(6.625,4.9) 10(4.085,4.9) 11(-4.085,4.9) 12(-6.625,4.9)
  round 2.63 hole 1.63: SH(-7.745,-3.05) SH(7.745,-3.05)
  round 3.25 hole 3.25 unplated: ""(-5.715,0) ""(5.715,0)
  silkscreen extent -8.02,-10.68 8.02,10.92, body extent -8.02,-10.37 8.02,10.93, height 13.7
"RJ45-8P8C Generic" [mm] "Robu.in RoboticsDNA"
  round 1.208 hole 0.7: 1(-4.445,6.35) 2(-3.175,8.89) 3(-1.905,6.35) 4(-0.635,8.89) 5(0.635,6.35) 6(1.905,8.89) 7(3.175,6.35) 8(4.445,8.89)
  round 3 hole 3 unplated: MH1(-5.715,0) MH2(5.715,0)
  round 3 hole 2: SHIELDL(-7.938,-3.21) SHIELDR(7.938,-3.21)
  silkscreen extent -7.85,-8 7.85,10.5, body extent -7.85,-8 7.85,10.5, height 12
"Terminal Screw 5.08mm" [mm]
  round 1.6 hole 1.2: 1(-2.54,0) 2(2.54,0)
  silkscreen extent -5.08,-5.65 5.08,5.65, body extent -5.08,-5.65 5.08,5.65, height 12
TLV767xxDRVR [mm]
  rect 0.656x0.292 smd paste+0 mask+0: 1(-1.028,0.65) 2(-1.028,0) 3(-1.028,-0.65) 4(1.028,-0.65) 5(1.028,0) 6(1.028,0.65)
  rect 1.1x1.7 smd paste-0.837 mask+0: 7(0,0)
  silkscreen extent -1,-1.17 1,1.17, body extent -1,-1 1,1, height 0.8
UCC21551ADWR [mm]
  rect 1.874x0.558 smd paste+0 mask+0: 1(-4.734,4.445) 2(-4.734,3.175) 3(-4.734,1.905) 4(-4.734,0.635) 5(-4.734,-0.635) 6(-4.734,-1.905) 7(-4.734,-3.175) 8(-4.734,-4.445) 9(4.734,-4.445) 10(4.734,-3.175) 11(4.734,-1.905) 12(4.734,-0.635) 13(4.734,0.635) 14(4.734,1.905) 15(4.734,3.175) 16(4.734,4.445)
  silkscreen extent -3.92,-5.37 3.92,5.37, body extent -5.32,-5.25 5.32,5.25, height 2.64